# Altium PCB converter.PcbDoc
Units mm, origin at the board's own origin, x right, y up, seen from the top; angles counter-clockwise.
Board outline 55.9 x 42.2 mm, 2 copper layers (Top Layer, Bottom Layer); 17 components, 8 nets, 43 pads, 12 vias.
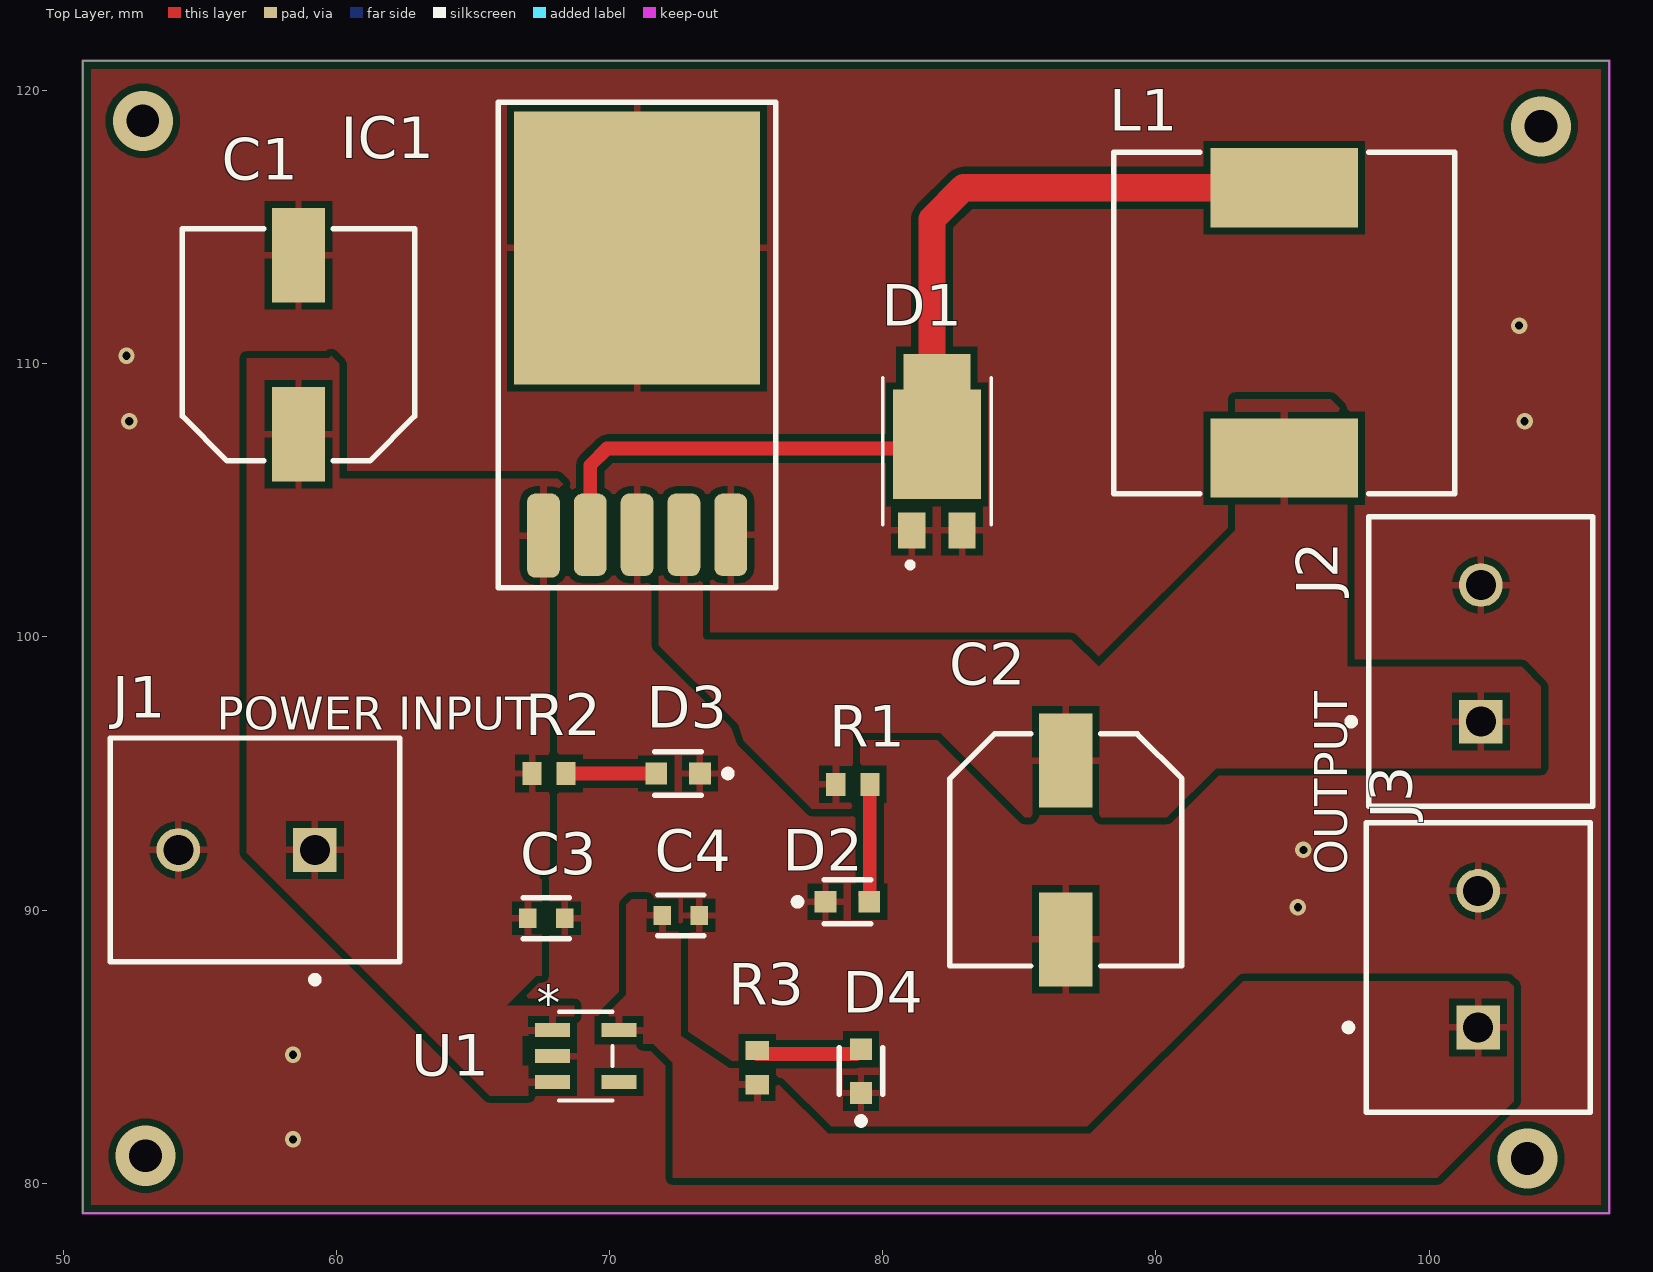
[diagram p0: Top Layer view]
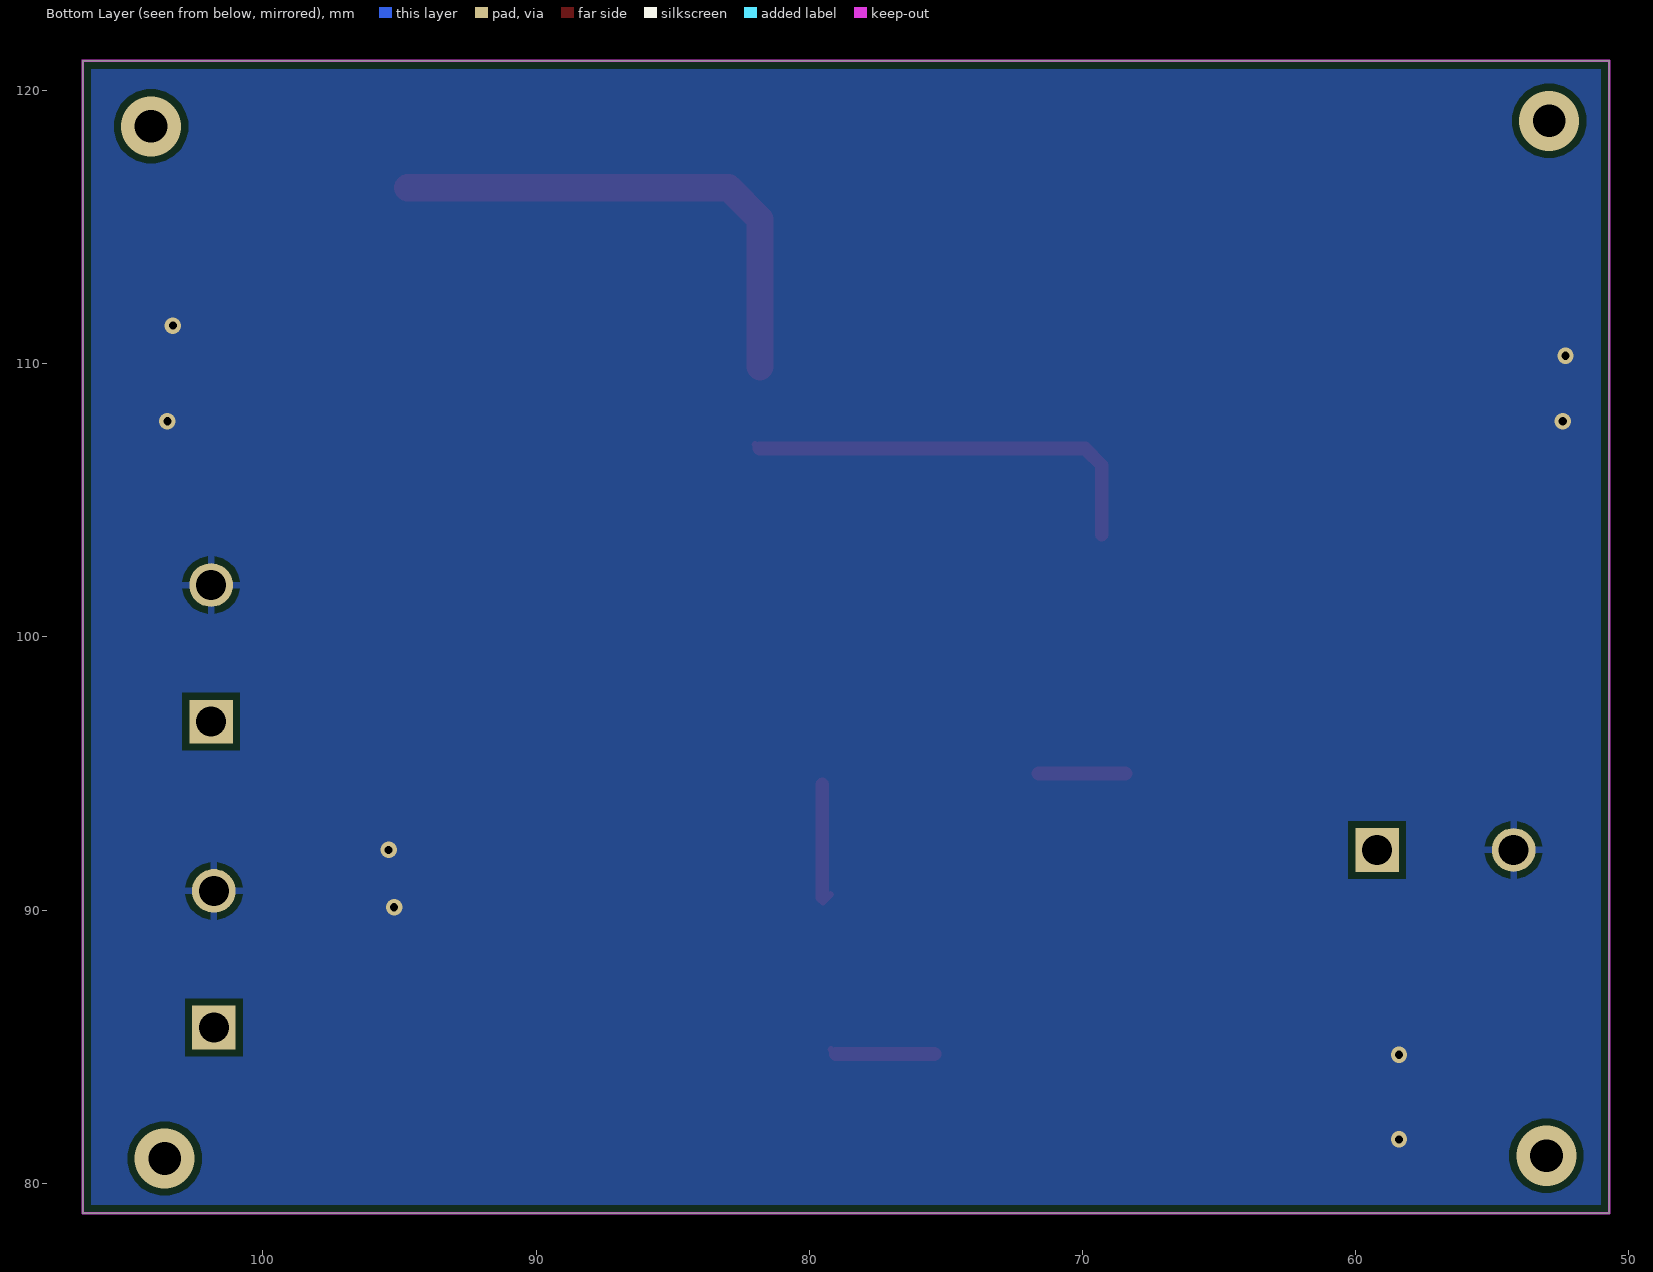
[diagram p1: Bottom Layer view, seen from below]
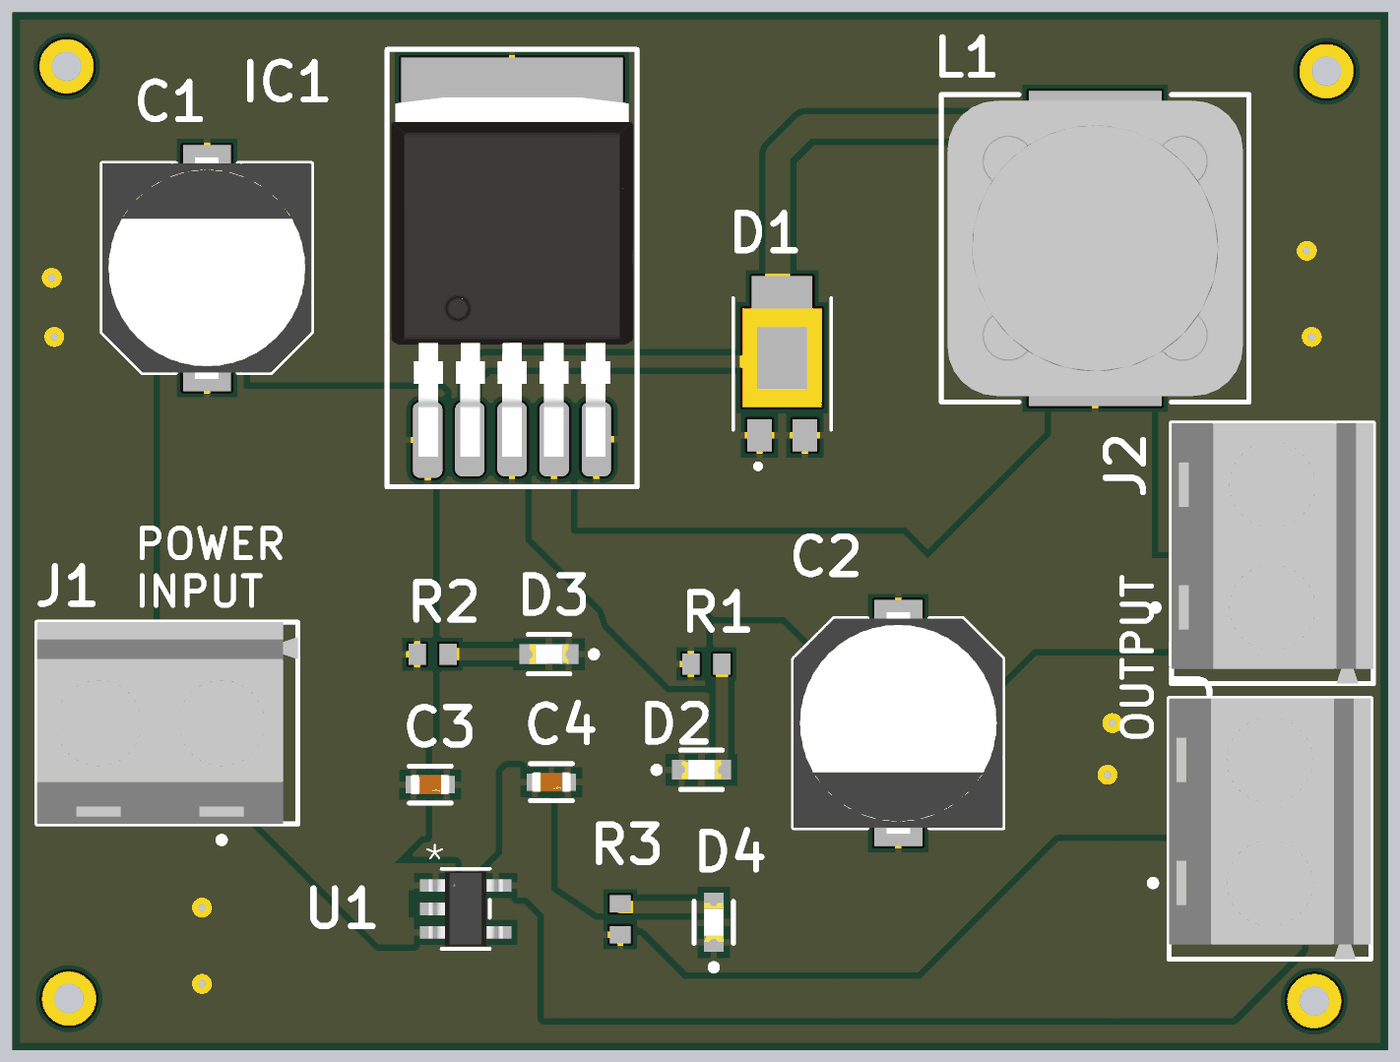
[diagram p2: 3D render of the assembled board from above, using the file's embedded part models]

## Layer stack, top to bottom
Top Solder: solder mask 0.0102, Solder Resist, Dk 3.5
Top Layer: signal copper 0.0356
Dielectric 1: dielectric 0.32, FR-4, Dk 4.8
Bottom Layer: signal copper 0.0356
Bottom Solder: solder mask 0.0102, Solder Resist, Dk 3.5

## Board outline
50.7,78.9 50.7,121.1 106.6,121.1 106.6,78.9

## Design rules (kind name [scope] priority, off if disabled: settings)
Clearance [All] p1: gap=0.254 ignorepadtopadclearanceinfootprint=FALSE except(0: Arc-Hole Track-Hole SMDPad-Hole THPad-Hole Via-Hole Fill-Hole Poly-Hole Region-Hole Text-Hole)
PolygonConnect [All] p1: connectstyle=Relief reliefconductorwidth=0.254 reliefentries=4 polygonreliefangle="90 Angle" airgapwidth=0.254
RoutingVias [All] p1: holewidth=0.711 width=1.27 viastyle="Through Hole" minholewidth=0.711 minwidth=1.27 maxholewidth=0.711 maxwidth=1.27
SolderMaskExpansion [All] p1: expansion=0.102 istentingtop=FALSE
Width [All] p1: maxlimit=0.254 minlimit=0.254 preferedwidth=0.254
30 further rules are at their usual default settings.

## Components (designator, comment, footprint, x,y, rotation, side; value= is the part's Value field where it differs from the comment)
C1 "16SVP180M" PNSC-SVP-E12_L 58.6,110.7 r90 top
C2 "16SVP180M" PNSC-SVP-E12_L 86.7,92.2 r270 top
C3 "GRM188R71E474KA12D" FP-GRM188-0_1-e0_2_0_5-MFG 67.675,89.7 r0 top
C4 "GRM188R71E474KA12D" FP-GRM188-0_1-e0_2_0_5-MFG 72.6,89.8 r0 top
D1 "MBR1560STR" DIO_MBR1560STR 81.98,106.805 r90 top
D2 "150060RS75000" FP-150060RS75000-MFG 78.7,90.3 r0 top
D3 "150060RS75000" FP-150060RS75000-MFG 72.5,95 r180 top
D4 "150060RS75000" FP-150060RS75000-MFG 79.2,84.1 r90 top
IC1 "LM2596" D2PAK 71,112.6 r0 top
J1 "282836-2" TECO-282836-2_V 56.7,92.2 r180 top
J2 "282836-2" TECO-282836-2_V 101.9,99.4 r90 top
J3 "282836-2" TECO-282836-2_V 101.8,88.2 r90 top
L1 "7447709150" WE-PD-XXL 94.7,111.5 r270 top
R1 "ERJ-3EKF1001V" RESC1608X55X30LL15T15 78.9,94.6 r0 top
R2 "ERJ-3EKF1001V" RESC1608X55X30LL15T15 67.775,95 r180 top
R3 "ERJ-3EKF1001V" RESC1608X55X30LL15T15 75.4,84.225 r90 top
U1 "ADP3309ARTZ-2.5RL7" RJ_5_ADI 69.119,84.65 r0 top

## Footprints (in the part's own frame and the unit in brackets; to place one, negate y for a bottom-side part, rotate by r counter-clockwise, add the part's x,y. Pads: shape width x height; smd on the part's side, far side on the other; paste and mask are expansions set on the pad)
D2PAK [mm]
  rrect50% 1.2x3.075 smd: 1(-3.429,-8.89)
  rrect50% 1.2x3.015 smd: 2(-1.714,-8.86) 3(0,-8.86) 4(1.714,-8.86) 5(3.429,-8.86)
  rect 9x10 smd: 3(0,1.651)
  silkscreen extent -5.08,-10.79 5.08,6.98, body extent -4.91,-9.56 4.91,5.04, height 4.22
DIO_MBR1560STR [mm]
  rect 1.31x1 smd: 1(-2.905,0.92) 2(-2.905,-0.92)
  rect 1.31x2.46 smd: 3(2.905,0)
  rect 4.01x3.22 smd paste-3: 4(0.245,0)
  silkscreen extent -4.26,-1.99 2.69,1.99
FP-150060RS75000-MFG [mm]
  rect 0.8x0.8 smd paste+0 mask+0: 1(-0.8,0) 2(0.8,0)
  silkscreen extent -1.95,-0.8 0.85,0.8, body extent -1.3,-0.55 1.3,0.55, height 0.25
FP-GRM188-0_1-e0_2_0_5-MFG [mm]
  rect 0.65x0.7 smd paste+0 mask+0: 1(-0.675,0) 2(0.675,0)
  silkscreen extent -0.85,-0.75 0.85,0.75, body extent -1.1,-0.55 1.1,0.55, height 0.25
PNSC-SVP-E12_L [mm] "Aluminum Electrolytic Capacitor, Body 8.30x8.30x12.00mm, IPC High Density"
  rect 3.45x1.95 smd: 1(-3.275,0) 2(3.275,0)
  silkscreen extent -4.25,-4.25 4.25,4.25, body extent -4.5,-4.25 4.5,4.25, height 12
RESC1608X55X30LL15T15 [mm] "Chip Resistor, 2-Leads, Body 1.60x0.80mm, IPC High Density"
  rect 0.7x0.85 smd: 1(-0.625,0) 2(0.625,0)
  body extent -0.87,-0.48 0.87,0.48, height 0.55
RJ_5_ADI [mil]
  rect 50x20 smd paste+0 mask+0: 1(-48,37.4) 2(-48,0) 3(-48,-37.4) 4(48,-37.4) 5(48,37.4)
  silkscreen extent -38,-64 38,64, body extent -59,-59 59,59, height 57
TECO-282836-2_V [mm] "Female Header, Pitch 5mm, 1 x 2 Position, Height 10mm"
  rect 1.6x1.6 hole 1.1: 1(-2.5,0)
  round 1.6 hole 1.1: 2(2.5,0)
  silkscreen extent -5.6,-4.1 5,4.87, body extent -5.6,-4.1 5,4.1, height 10
WE-PD-XXL [mm] "SMD Inductor, 2-Leads, Body 12.0 x 12.0 mm"
  rect 2.9x5.4 smd: 1(-4.95,0) 2(4.95,0)
  silkscreen extent -6.25,-6.25 6.25,6.25, body extent -6,-6 6,6, height 10.36

## Part data
C1: library part CMP-2000-05492-1, "Conductive Polymer Aluminum Solid Capacitor, 180 uF, +/- 20%, 16 V, -55 to 105 degC, 2-Pin SMD (E12), RoHS, Tape and Reel", Capacitance=680µF, Capacitance Tolerance=±20%, Capacitor Case Style=RadialCan-SMD, Life Time @ Temperature=2000hours@105°C, Manufacturer=Panasonic, Operating Temperature Max=105°C, Operating Temperature Min=-55°C, Package Description="2-Pin Surface Mount Device, Body 8.3 x 8.3 mm", Package Reference=SVP-E12, Ripple Current AC=3.64A, Voltage Rating=16V, Datasheet URL=https://industrial.panasonic.com/cdbs/www-data/pdf/AAB8000/AAB8000C193.pdf, Datasheet Version=11/2015, Diameter=8mm, ESR=0.02ohm, Height=11.9mm, Manufacturer Part Number=16SVP180M, Manufacturer URL=http://www.panasonic.com/, Mounting Technology=SurfaceMount, Packaging=CutTape, Product Range=PANASONIC-SVPSeries, SVHC=ToBeAdvised
C2: library part CMP-2000-05492-1, "Conductive Polymer Aluminum Solid Capacitor, 180 uF, +/- 20%, 16 V, -55 to 105 degC, 2-Pin SMD (E12), RoHS, Tape and Reel", Capacitance=220uF, Capacitance Tolerance=±20%, Capacitor Case Style=RadialCan-SMD, Life Time @ Temperature=2000hours@105°C, Manufacturer=Panasonic, Operating Temperature Max=105°C, Operating Temperature Min=-55°C, Package Description="2-Pin Surface Mount Device, Body 8.3 x 8.3 mm", Package Reference=SVP-E12, Ripple Current AC=3.64A, Voltage Rating=16V, Datasheet URL=https://industrial.panasonic.com/cdbs/www-data/pdf/AAB8000/AAB8000C193.pdf, Datasheet Version=11/2015, Diameter=8mm, ESR=0.02ohm, Height=11.9mm, Manufacturer Part Number=16SVP180M, Manufacturer URL=http://www.panasonic.com/, Mounting Technology=SurfaceMount, Packaging=CutTape, Product Range=PANASONIC-SVPSeries, SVHC=ToBeAdvised
C3 C4: library part CMP-06035-003857-1, "Chip Multilayer Ceramic Capacitors for General Purpose, 0603, 0.47uF, X7R, 15%, 10%, 25V", Capacitance=0.47µF, Case Code (Metric)=1608, Case Code (Imperial)=0603, Dielectric=X7R, Manufacturer=Murata, Max Operating Temperature=125°C, Min Operating Temperature=-55°C, Package Quantity=4000, Tolerance=10%, Voltage=50V, Voltage Rating=25V, Case/Package=0603, Depth=0.8mm, Height=0.8mm, Lead Free="Lead Free", Length=1.6mm, Manufacturer Part Number=GRM188R71E474KA12D, Material=Ceramic, Mount="Surface Mount", Number of Pins=2, Packaging="Tape and Reel", REACH SVHC="No SVHC", Termination=SMD/SMT, Thickness=0.035inch, Voltage Rating (DC)=25V, Width=0.031inch
D1: "Diode Schottky 60V 15A Surface Mount TO-277B", Package="TO-277 SMC Diode Solutions", Availability=Warning, Check_prices=https://www.snapeda.com/parts/MBR1560STR/SMC%20Diode%20Solutions/view-part/3611008/?ref=eda, MF="SMC Diode Solutions", MP=MBR1560STR, Price=None, Purchase-URL=https://pricing.snapeda.com/search/part/MBR1560STR/?ref=eda, SnapEDA_Link=https://www.snapeda.com/parts/MBR1560STR/SMC%20Diode%20Solutions/view-part/3611008/?ref=snap
D2 D3 D4: library part CMP-1426-00001-2, "LED RED CLEAR 0603 SMD", Case Code (Metric)=1608, Case Code (Imperial)=0603, Color=RED, Forward Current=30mA, Forward Voltage=2V, Lens Color=Colorless, Manufacturer="Wurth Electronics", Max Operating Temperature=85°C, Min Operating Temperature=-40°C, Package Quantity=1, Test Current=20mA, Case/Package=0603, Dominant Wavelength=625nm, Height=0.8mm, Length=1.6mm, Lens Size=0.7mm, Lens Style=Clear, Lens Transparency=Clear, Luminous Intensity=250mcd, Manufacturer Part Number=150060RS75000, Mount="Surface Mount", Packaging="Cut Tape", RoHS Compliant=Yes, Series=WL-SMCW, Viewing Angle=140°, Wavelength=625nm, Width=0.8mm
J1 J2 J3: library part CMP-1684-00017-1, "Female Header, Pitch 5 mm, 1 x 2 Position, Height 10 mm, Tail Length 3.5 mm, Rohs, Bulk", Color=Green, Current=13.5A, Manufacturer="TE Connectivity", Package Description="Female Header, Pitch 5 mm, 1 x 2 Position, Height 10 mm, Tail Length 3.5 mm", Package Reference=THD, Standard Package=300, Voltage=300V, 3D Model=282836-2.pdf, Category=Connectors,Interconnects, Clamp Material - Plating=Brass-NickelPlated, Contact Material - Plating=Brass-TinPlated, Datasheet URL=http://www.te.com.cn/commerce/DocumentDelivery/DDEController?Action=showdoc&DocId=Catalog+Section%7F1308389_EUROSTYLE_TERMINAL_BLOCKS%7F0607%7Fpdf%7FEnglish%7FENG_CS_1308389_EUROSTYLE_TERMINAL_BLOCKS_0607.pdf%7F282836-2, Dynamic Catalog=BuchananSeries, Family=TerminalBlocks-WiretoBoard, Featured Product=EurostyleTerminalBlockConnectors, Features=Interlocking(Side), Housing Material=Polyamide(PA66),Nylon6/6, Manufacturer Part Number=282836-2, Manufacturer URL=http://www.te.com, Mating Orientation=HorizontalwithBoard, Mounting Type=ThroughHole, Number of Levels=1, Other Names="5ULV-02B / A98076", Packaging=Bulk, Pitch="0.197\"(5.00mm)", Positions Per Level=2, Product Training Modules=Wire-to-BoardEurostyleTerminalBlocks, RoHS Information=282836-2StatementofCompliance, Screw Material - Plating=Brass-NickelPlated, Screw Thread=M3, Series=Buchanan, Torque - Screw=0.68Nm(6Lb-In), Wire Gauge=16-30AWG, Wire Termination=Screw-RisingCageClamp
L1: library part CMP-0227-00106-1, "SMD-Shielded Power Inductor WE-PD, L = 15.0 µH", Manufacturer="Wurth Electronics", Inductance=33µH, ComponentLink1Description="Manufacturer Link", ComponentLink1URL=http://www.we-online.com, ComponentLink2Description=Datasheet, ComponentLink2URL=http://www.we-online.de/katalog/media/pdf/7447709150.pdf, DatasheetVersion="ver 4, Oct-2006", Manufacturer Part Number=7447709150, PackageDescription="SMD Inductor, 2-Leads, Body 12.0 x 12.0 mm", PackageReference=WE-PD-XXL, PackageVersion=2004
R1 R2 R3: library part CMP-2000-00180-1, Case Code (Metric)=1608, Case Code (Imperial)=0603, Manufacturer=Panasonic, Manufacturer Part Number=ERJ3EKF1001V, Max Operating Temperature=155°C, Max Power Dissipation=100mW, Min Operating Temperature=-55°C, Package Quantity=5000, Resistance=1k, Resistance Tolerance=1%, Resistor Type="Thick Film", Temperature Coefficient=100ppm/°C, Voltage Rating=75V, Case/Package=0603, Category="Chip SMD Resistors", ComponentLink1Description=https://datasheet.ciiva.com/7942/aoa0000ce2-7942427.pdf?src-supplier=Element14, ComponentLink1URL=https://datasheet.ciiva.com/7942/aoa0000ce2-7942427.pdf?src-supplier=Element14, ComponentLink2Description=https://datasheet.ciiva.com/46373/1678782-46373340.pdf?src-supplier=Element14, ComponentLink2URL=https://datasheet.ciiva.com/46373/1678782-46373340.pdf?src-supplier=Element14, ComponentLink3Description=https://datasheet.ciiva.com/22673/1678782-22673918.pdf?src-supplier=Element14, ComponentLink3URL=https://datasheet.ciiva.com/22673/1678782-22673918.pdf?src-supplier=Element14, ComponentLink4Description=https://datasheet.ciiva.com/46373/1678782-46373339.pdf?src-supplier=Element14, ComponentLink4URL=https://datasheet.ciiva.com/46373/1678782-46373339.pdf?src-supplier=Element14, ComponentLink5Description=https://datasheet.ciiva.com/24070/aoa0000ce2-24070269.pdf?src-supplier=Mouser, ComponentLink5URL=https://datasheet.ciiva.com/24070/aoa0000ce2-24070269.pdf?src-supplier=Mouser, ComponentLink6Description=https://datasheet.ciiva.com/16768/70260748-16768437.pdf?src-supplier=Allied+Electronics, ComponentLink6URL=https://datasheet.ciiva.com/16768/70260748-16768437.pdf?src-supplier=Allied+Electronics, ComponentLink7Description=https://datasheet.ciiva.com/16774/70260748-16774550.pdf?src-supplier=Allied+Electronics, ComponentLink7URL=https://datasheet.ciiva.com/16774/70260748-16774550.pdf?src-supplier=Allied+Electronics, ComponentLink8Description=https://datasheet.ciiva.com/9198/aoa0000ce2-9198923.pdf?src-supplier=Avnet, ComponentLink8URL=https://datasheet.ciiva.com/9198/aoa0000ce2-9198923.pdf?src-supplier=Avnet, ComponentLink9Description=https://datasheet.ciiva.com/16449/aoa0000ce2-16449065.pdf?src-supplier=Future+Electronics, ComponentLink9URL=https://datasheet.ciiva.com/16449/aoa0000ce2-16449065.pdf?src-supplier=Future+Electronics, Construction=Rectangular, Contact Plating=Tin, Depth=0.8mm, Features="Automotive AEC-Q200", Height=0.45mm, Lead Free="Lead Free", Length=1.6mm, Military Standard=Not, Mount="Surface Mount", Number of Pins=2, Number of Terminations=2, Packaging="Tape and Reel", Part Number=ERJ-3EKF1001V, Power Rating=100mW, Pricing 1="5000=0,00840, 50000=0,00440, 60000=0,00430, 80000=0,00420, 200000=0,00410, 2000000=0,00400 (USD)", Radiation Hardening=No, REACH SVHC="No SVHC", RoHS=Yes, RoHS Compliant=Yes, Series=ERJ, Size Code=0603, Stock 1=10000, Supplier 1="Arrow Electronics", Supplier Part Number 1=ERJ-3EKF1001V, Technology="THICK FILM", Termination=SMD/SMT, Tolerance=1%, Voltage Rating (DC)=75V, Width=0.8mm
U1: "No Description Available", Mfr_Name="Analog Devices Inc", Copyright="Copyright (C) 2022 Ultra Librarian. All rights reserved.", Digi-Key_Part_Number_1=2156-ADP3309ARTZ-2.5RL7-ND, Digi-Key_Part_Number_2=505-ADP3309ARTZ-2.5RL7CT-ND, Digi-Key_Part_Number_3=505-ADP3309ARTZ-2.5RL7DKR-ND, Digi-Key_Part_Number_4=505-ADP3309ARTZ-2.5RL7TR-ND, Digi-Key_Part_Number_5=ADP3309ARTZ-2.5RL7-ND, Digi-Key_Part_Number_6=ADP3309ARTZ-2.5RL7CT-ND, Digi-Key_Part_Number_7=ADP3309ARTZ-2.5RL7DKR-ND, Digi-Key_Part_Number_8=ADP3309ARTZ-2.5RL7TR-ND, Manufacturer_Part_Number=ADP3309ARTZ-2.5RL7, RefDes=RefDes, Type=DEV

## Via types
v1: diameter 0.6, hole 0.3, Top Layer to Bottom Layer, 8 vias
v2: diameter 2.2, hole 1.2, Top Layer to Bottom Layer, 4 vias

## Nets (pads, with @x,y where several pads share a name; then routed paths per layer and width w, separated by ;. In a path a pad name is that pad's centre, name@x,y a point inside that pad or via, vN(x,y) a via of type N, cw(c..) or ccw(c..) an arc to the next point about the centre after c; other vN are vias at no path point)
3.3: C4.1 J3.1 R3.1 U1.5
+5: C2.1 IC1.4 J2.1 L1.2 R1.1
+12: C1.1 C3.1 IC1.1 J1.1 R2.2 U1.1 U1.3
GND: C1.2 C2.2 C3.2 C4.2 D1.1 D1.2 D2.1 D3.1 D4.1 IC1.3 IC1.5 J1.2 J2.2 J3.2 U1.2
  other v1: 58.4,81.6 58.4,84.7 95.2,90.1 95.4,92.2 52.4,107.9 103.5,107.9 52.3,110.3 103.3,111.4
NetD1_3: D1.3 D1.4 IC1.2 L1.1 | length 34.7
  Top Layer w0.254: D1.3@81.8,109.89 D1.3 ; D1.4@81.83,106.9 D1.4 ; L1.1@94.6,116.35 L1.1
  Top Layer w0.5: IC1.2 69.286,106.285 69.9,106.9 D1.4@81.83,106.9
  Top Layer w1: D1.3@81.8,109.89 81.8,115.3 82.95,116.45 L1.1
NetD2_2: D2.2 R1.2 | length 4.5
  Top Layer w0.254: D2.2@79.225,90.575 D2.2
  Top Layer w0.5: D2.2@79.525,90.475 R1.2
NetD3_2: D3.2 R2.1 | length 3.3
  Top Layer w0.254: D3.2@71.6,94.9 D3.2
  Top Layer w0.5: R2.1 D3.2@71.6,95
NetD4_2: D4.2 R3.2 | length 3.9
  Top Layer w0.254: D4.2@79.025,84.725 D4.2
  Top Layer w0.5: R3.2@75.4,84.725 D4.2@79.025,84.725
pads on no net: U1.4
copper on no net:
  other v2: 103.6,80.9 53,81 104.1,118.7 52.9,118.9

## Polygon pours and split planes (outlines as drawn)
GND on Top Layer "GND_L01_P015" (solid, pour order 15): 50.5,121.1 106,121.1 106.7,120.4 106.7,78.7 50.9,78.7 50.7,78.9
+12 on Top Layer "+12_L01_P014" (solid, pour order 14): 68.6,83.2 68.7,83.3 68.7,84.3 66.8,84.3 66.8,85.4 68.7,85.4 68.7,86.5 66.2,86.5 67.3,87.6 67.5,87.6 67.5,91.1 67.4,91.2 67.8,91.6 67.8,105.1 68.3,105.6 68.1,105.8 60.1,105.8 60.1,110 59.8,110.3 59.7,110.2 56.7,110.2 56.7,92.1 65.6,83.2
+5 on Top Layer "+5_L01_P013" (solid, pour order 13): 73.4,105.5 73.3,105.6 71.8,105.6 71.8,99.7 74.5,97 74.7,96.8 74.9,96.2 77.4,93.7 78.9,93.7 78.9,96.8 79.2,96.5 82.1,96.5 85.2,93.4 90.4,93.4 92.2,95.2 104.1,95.2 104.1,98.2 103.4,98.9 97,98.9 97,108.1 96.4,108.7 92.9,108.7 92.9,103.9 87.9,98.9 86.9,99.9 73.5,99.9 73.4,100
3.3 on Top Layer "3.3_L01_P012" (solid, pour order 12): 72.6,90.4 70.8,90.4 70.6,90.2 70.6,86.9 69.5,85.8 69.5,85.1 71.6,85.1 72.3,84.4 72.3,80.2 100.3,80.2 103.1,83 103.1,87.2 102.9,87.4 93.2,87.4 87.6,81.8 78,81.8 76,83.8 76,84.2 74.4,84.2 72.6,85.4
GND on Bottom Layer "GND_L02_P016" (solid, pour order 16): 50.8,121.3 51.1,121 106.5,121 106.5,78.9 106.4,78.8 106.3,78.9 50.9,78.9

## Keep-outs
Keep-Out Layer:
  lines w0.1: 106.6,121.1 106.6,78.9 50.7,78.9 50.7,81.8 50.7,121.1 106.6,121.1 ; 106.6,121.1 106.6,121.1

## Silkscreen, mask and mechanical layers (free items; w line width, h text height)
Top Overlay:
  text "POWER INPUT" at 55.6,96.6 h1.2
  text "OUTPUT" at 97,91.3 h1.2 r90

## Text inside footprints (layer, text, board x,y; h text height)
U1: Top Overlay "*" at 67.328,85.981 h1.27; Top 3D Body "*" at 68.205,85.016 h1.27